# Altium PCB gY-950A20200704V1.PcbDoc (part 2 of 5)
Units mm, origin at the board's own origin, x right, y up, seen from the top; angles counter-clockwise.
Board outline 59.48 x 100.3 mm, 2 copper layers (Top Layer, Bottom Layer), stack 0.193 mm thick; 144 components, 124 nets, 550 pads, 234 vias.
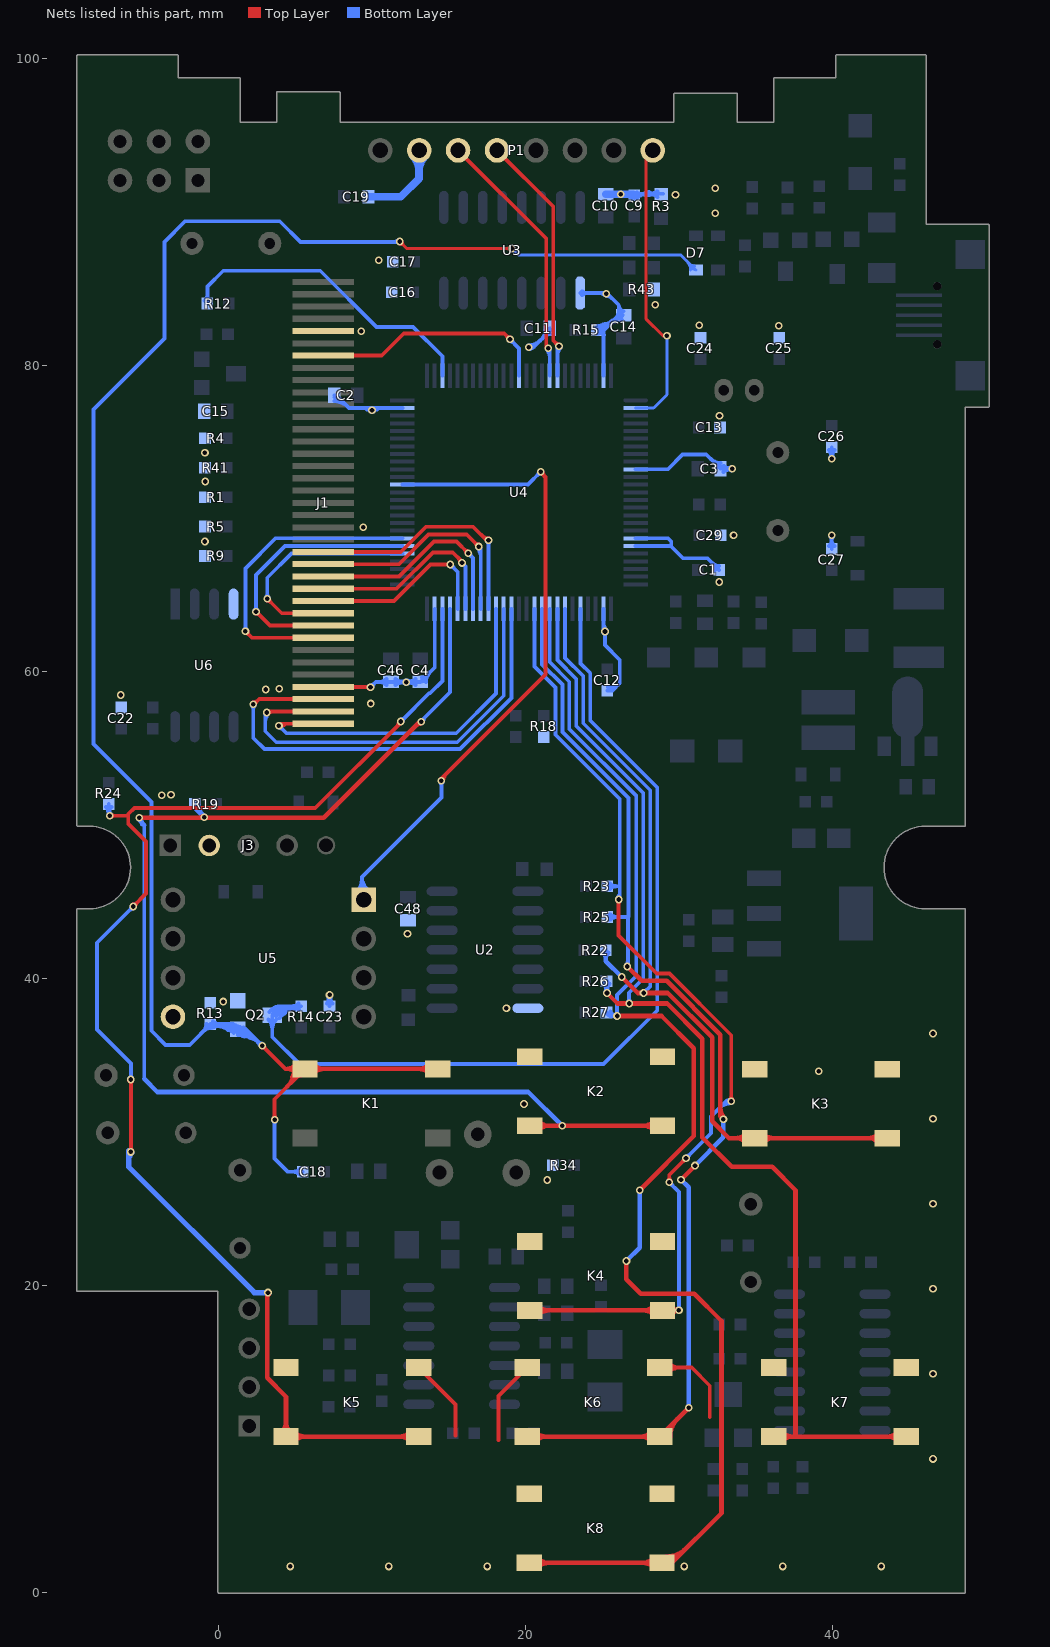
[diagram p2: the nets of this part, all layers, seen from the top]

## Via types
v1: diameter 0.5, hole 0.3, Top Layer to Bottom Layer, tented both sides, 234 vias

## Nets (pads, with @x,y where several pads share a name; then routed paths per layer and width w, separated by ;. In a path a pad name is that pad's centre, name@x,y a point inside that pad or via, vN(x,y) a via of type N, cw(c..) or ccw(c..) an arc to the next point about the centre after c; other vN are vias at no path point) (continued)
DB5: J1.35 U4.39 | length 32.8
  Top Layer w0.25: v1@2.311,57.912 2.625,58.225 J1.35@6.807,58.225 ; v1@2.235,58.012 ccw(c2.235,58.436) 2.535,58.136 cw(c2.235,58.436) v1@2.235,58.012
  Bottom Layer w0.25: v1@2.261,57.912 v1(2.235,57.887) 2.235,55.702 2.972,54.966 15.723,54.966 19.066,58.309 U4.39@19.066,64.112 ; 2.235,57.585 cw(c2.537,57.585) 2.324,57.798 ccw(c2.537,57.585) 2.235,57.585 ; 2.235,57.585 ccw(c1.933,57.585) 2.147,57.798 cw(c1.933,57.585) 2.235,57.585
DB6: J1.36 U4.40 | length 30
  Top Layer w0.25: v1(3.124,57.353) 3.196,57.425 J1.36@6.807,57.425 ; v1@3.213,57.265 cw(c3.6,56.878) 3.6,57.425 ccw(c3.6,56.878) v1@3.213,57.265
  Bottom Layer w0.25: v1@3.042,57.259 cw(c2.925,57.124) 3.08,57.034 ; v1@3.175,57.455 3.023,57.302 3.023,56.134 3.738,55.419 15.535,55.419 18.566,58.45 U4.40@18.566,64.112 ; 3.023,56.806 cw(c3.671,56.806) 3.213,57.265 ccw(c3.671,56.806) 3.023,56.806
DB7: J1.37 U4.41 | length 26.4
  Top Layer w0.25: v1(3.912,56.49) 4.047,56.625 J1.37@6.807,56.625 ; v1@3.99,56.587 ccw(c4.153,56.789) 4.282,56.564 ; v1@4,56.401 cw(c4.541,55.86) 4.541,56.625 ccw(c4.541,55.86) v1@4,56.401
  Bottom Layer w0.25: v1(3.912,56.49) 4.401,56 15.475,56 18.066,58.591 U4.41@18.066,64.112 ; 4.125,56.276 cw(c4.338,56.49) 4.037,56.49 ccw(c4.338,56.49) 4.125,56.276 ; 4.125,56.276 ccw(c3.912,56.063) 3.912,56.365 cw(c3.912,56.063) 4.125,56.276
DB8: J1.23 U4.42 | length 18.3
  Top Layer w0.25: J1.23@6.807,67.825 11.85,67.825 13.493,69.469 16.561,69.469 17.501,68.529 17.526,68.529 v1(17.577,68.58) ; 17.147,68.883 ccw(c17.577,69.313) 17.577,68.705 cw(c17.577,69.313) 17.147,68.883
  Bottom Layer w0.25: U4.42@17.566,64.112 17.566,68.464 17.501,68.529 17.526,68.529 v1(17.577,68.58) ; v1@17.488,68.492 cw(c17.301,68.304) 17.566,68.304 ccw(c17.301,68.304) v1@17.488,68.492 ; 17.566,68.253 cw(c17.904,68.253) 17.665,68.492 ccw(c17.904,68.253) 17.566,68.253
DB9: J1.24 U4.43 | length 17.8
  Top Layer w0.25: J1.24@6.807,67.025 11.729,67.025 13.665,68.961 16.154,68.961 v1(16.942,68.174) ; 16.728,68.387 cw(c16.515,68.174) 16.817,68.174 ccw(c16.515,68.174) 16.728,68.387 ; 16.728,68.387 ccw(c16.942,68.6) 16.942,68.299 cw(c16.942,68.6) 16.728,68.387
  Bottom Layer w0.25: v1(16.942,68.174) 17.066,68.049 U4.43@17.066,64.112 ; 17.007,67.82 cw(c17.207,67.936) v1@17.035,68.09 ; v1@16.853,68.085 cw(c16.34,67.572) 17.066,67.572 ccw(c16.34,67.572) v1@16.853,68.085
DB10: J1.25 U4.44 | length 16.4
  Top Layer w0.25: J1.25@6.807,66.225 11.742,66.225 14.021,68.504 15.494,68.504 v1(16.256,67.742) ; 16.043,67.955 cw(c15.829,67.742) 16.131,67.742 ccw(c15.829,67.742) 16.043,67.955 ; 16.043,67.955 ccw(c16.256,68.169) 16.256,67.867 cw(c16.256,68.169) 16.043,67.955
  Bottom Layer w0.25: v1(16.256,67.742) 16.566,67.432 U4.44@16.566,64.112 ; 16.469,67.528 cw(c16.683,67.742) 16.381,67.742 ccw(c16.683,67.742) 16.469,67.528 ; 16.469,67.528 ccw(c16.256,67.315) 16.256,67.617 cw(c16.256,67.315) 16.469,67.528
DB11: J1.26 U4.45 | length 14.2
  Top Layer w0.25: J1.26@6.807,65.425 11.583,65.425 13.951,67.793 15.24,67.793 15.875,67.158 15.875,67.132 v1(15.85,67.107) ; 15.582,67.45 cw(c15.239,67.107) 15.725,67.107 ccw(c15.239,67.107) 15.582,67.45
  Bottom Layer w0.25: v1(15.85,67.107) 16.066,66.89 U4.45@16.066,64.112
DB12: J1.27 U4.46 | length 14.3
  Top Layer w0.25: J1.27@6.807,64.625 11.424,64.625 13.804,67.005 v1(15.088,67.005) ; 14.786,67.005 cw(c14.786,66.703) 14.999,66.917 ccw(c14.786,66.703) 14.786,67.005 ; 14.786,67.005 ccw(c14.786,67.307) 14.999,67.094 cw(c14.786,67.307) 14.786,67.005
  Bottom Layer w0.25: v1(15.088,67.005) 15.566,66.527 U4.46@15.566,64.112 ; 15.301,66.792 cw(c15.514,67.005) 15.213,67.005 ccw(c15.514,67.005) 15.301,66.792 ; 15.301,66.792 ccw(c15.088,66.578) 15.088,66.88 cw(c15.088,66.578) 15.301,66.792
DB13: J1.28 U4.55 | length 16.9
  Top Layer w0.25: v1(3.15,64.77) 4.094,63.825 J1.28@6.807,63.825 ; 3.363,64.557 cw(c3.576,64.77) 3.275,64.77 ccw(c3.576,64.77) 3.363,64.557 ; 3.363,64.557 ccw(c3.15,64.343) 3.15,64.645 cw(c3.15,64.343) 3.363,64.557
  Bottom Layer w0.25: v1@3.099,64.719 v1(3.15,64.77) 3.15,66.142 4.72,67.712 U4.55@11.966,67.712 ; 3.15,65.072 cw(c2.848,65.072) 3.061,64.858 ccw(c2.848,65.072) 3.15,65.072 ; 3.15,65.072 ccw(c3.451,65.072) 3.238,64.858 cw(c3.451,65.072) 3.15,65.072
DB14: J1.29 U4.56 | length 19.4
  Top Layer w0.25: v1(2.413,63.932) 3.32,63.025 J1.29@6.807,63.025 ; 2.626,63.718 cw(c2.84,63.932) 2.538,63.932 ccw(c2.84,63.932) 2.626,63.718 ; 2.626,63.718 ccw(c2.413,63.505) 2.413,63.807 cw(c2.413,63.505) 2.626,63.718
  Bottom Layer w0.25: v1(2.413,63.932) 2.413,66.319 4.306,68.212 U4.56@11.966,68.212 ; 2.413,64.234 cw(c2.111,64.234) 2.325,64.02 ccw(c2.111,64.234) 2.413,64.234 ; 2.413,64.234 ccw(c2.715,64.234) 2.501,64.02 cw(c2.715,64.234) 2.413,64.234
DB15: J1.30 U4.57 | length 22.3
  Top Layer w0.25: v1(1.727,62.662) 2.164,62.225 J1.30@6.807,62.225 ; 1.941,62.448 cw(c2.154,62.662) 1.852,62.662 ccw(c2.154,62.662) 1.941,62.448 ; 1.941,62.448 ccw(c1.727,62.235) 1.727,62.537 cw(c1.727,62.235) 1.941,62.448
  Bottom Layer w0.25: v1(1.727,62.662) 1.727,66.751 3.688,68.712 U4.57@11.966,68.712 ; 1.727,62.964 cw(c1.425,62.964) 1.639,62.75 ccw(c1.425,62.964) 1.727,62.964 ; 1.727,62.964 ccw(c2.029,62.964) 1.816,62.75 cw(c2.029,62.964) 1.727,62.964
GND: C1.2 C2.2 C3.2 C4.2 C9.2 C10.2 C11.1 C12.2 C13.2 C14.2 C15.2 C16.2 C17.1 C19.2 C22.1 C23.1 C24.1 C25.1 C26.1 C27.1 C29.1 C46.2 C48.1 J1.5 J1.34 J3.2 K2.3 K2.4 K3.3 K3.4 K4.3 K4.4 K5.3 K5.4 K6.3 K6.4 K7.3 K7.4 K8.3 K8.4 P1.2 Q2.E R1.1 R3.1 R4.1 R5.1 R9.1 R13.1 R15.2 R18.1 R34.1 R41.1 R43.2 U2.7 U3.1 U4.10 U4.19 U4.20 U4.27 U4.49 U4.74 U4.99 U5.5 U6.4 | length 167.3
  Top Layer w0.25: J1.34@6.807,59.025 9.86,59.025 v1(9.881,59.004) ; K5.3@13.019,14.643 15.418,12.244 15.418,10.211 ; 18.237,9.931 18.237,12.788 K6.4@20.092,14.643 K6.4@19.774,14.643 ; K6.3@28.742,14.643 30.823,14.643 32.004,13.462 32.004,11.405 ; K6.3@29.318,14.342 cw(c30.043,13.617) 30.043,14.643 cw(c30.043,15.669) K6.3@29.318,14.943 ; 9.528,59.025 cw(c9.528,58.652) 9.792,58.916 ccw(c9.528,58.652) 9.528,59.025 ; 9.63,59.025 ccw(c9.63,59.255) 9.792,59.093 cw(c9.63,59.255) 9.63,59.025
  Bottom Layer w0.25: C23.1@7.079,38.419 ccw(c6.859,38.778) v1@7.28,38.778 ; 7.145,38.656 cw(c6.757,38.656) C23.1@7.032,38.382 ; v1@7.145,38.778 ccw(c7.567,38.778) C23.1@7.346,38.419 ; C23.1@7.213,38.201 v1(7.213,38.939) ; 7.28,38.656 ccw(c7.668,38.656) C23.1@7.394,38.382 ; C2.2@7.531,78.037 7.651,78.037 8.487,77.201 11.955,77.201 U4.74@11.966,77.212 ; C2.2@7.56,77.949 ccw(c8.289,78.281) 8.081,77.507 ; 9.608,77.14 ccw(c9.741,77.369) v1@9.905,77.162 ; v1(9.881,59.004) 10.224,59.347 C46.2@11.218,59.347 C4.2@13.123,59.347 14.066,60.29 U4.49@14.066,64.112 ; v1@10.06,77.162 ccw(c10.224,77.369) 10.356,77.14 ; C4.2@13.215,59.377 ccw(c13.016,59.983) 13.632,59.818 ; v1@20.193,81.053 ccw(c20.193,81.549) 20.543,81.199 ; v1(20.193,81.178) 20.523,81.178 21.577,82.233 C11.1@21.577,82.406 ; v1@20.193,81.303 ccw(c20.193,82.402) 20.97,81.625 ; v1@20.281,81.09 cw(c20.495,80.877) 20.495,81.178 cw(c20.495,81.48) v1@20.281,81.267 ; 21.175,81.853 cw(c21.756,81.698) C11.1@21.586,82.275 ; U3.1@23.554,84.696 25.286,84.696 26.069,83.913 ; R15.2@24.643,82.293 cw(c25.387,81.864) 25.165,82.693 ; R15.2@24.751,82.066 cw(c24.871,81.825) 25.104,81.959 ; R15.2@24.766,82.518 ccw(c25.065,83.036) 25.22,82.458 ; R15.2@24.811,82.469 cw(c24.193,81.851) 25.066,81.851 ; R15.2@24.862,82.172 cw(c25.389,81.879) 25.233,82.461 ; U4.27@25.066,64.112 25.066,62.64 25.07,62.636 v1(25.171,62.636) 25.171,61.747 26.137,60.782 26.137,59.258 ; U4.99@25.066,79.312 25.066,82.245 26.069,83.248 26.069,83.913 ; v1@25.087,62.729 ccw(c24.962,62.867) 25.124,62.961 ; C12.2@25.323,58.775 25.653,58.775 26.137,59.258 ; C12.2@25.327,58.771 cw(c25.974,58.205) 25.916,59.062 ; 25.743,82.818 ccw(c25.533,83.602) C14.2@26.269,83.262 ; C9.2@27.165,91.173 R3.1@28.962,91.173 ; U4.20@27.166,68.212 29.489,68.212 ; U4.19@27.166,68.712 29.281,68.712 29.489,68.504 29.489,68.212 ; U4.10@27.166,73.212 29.27,73.212 30.234,74.176 31.771,74.176 C3.2@32.702,73.245 v1(33.46,73.245) ; 27.633,91.173 ccw(c27.633,91.519) 27.877,91.274 ; 27.667,91.109 cw(c27.747,90.809) 27.903,91.078 ; 27.679,91.112 ccw(c27.604,91.395) 27.857,91.249 ; 27.695,91.173 cw(c27.695,90.915) 27.877,91.098 ; 28.028,91.078 cw(c28.2,90.78) 28.288,91.112 ; 28.043,91.284 ccw(c28.264,91.565) 28.357,91.22 ; 28.054,91.098 cw(c28.236,90.915) 28.236,91.173 ; 28.054,91.274 ccw(c28.298,91.519) 28.298,91.173 ; 28.074,91.248 ccw(c28.299,91.379) 28.232,91.127 ; 32.232,73.754 cw(c32.066,73.138) C3.2@32.673,73.337 ; C1.2@32.615,66.649 31.852,67.412 30.253,67.412 29.489,68.175 29.489,68.212 ; C26.1@39.811,74.438 cw(c39.555,74.052) v1@40.019,74.052 ; v1@39.888,74.052 cw(c40.352,74.052) C26.1@40.095,74.438 ; 39.888,74.191 ccw(c39.493,74.191) C26.1@39.772,74.471 ; C27.1@39.953,68.02 v1(39.953,68.909) ; v1(39.953,73.89) C26.1@39.953,74.652 ; 40.019,74.191 cw(c40.413,74.191) C26.1@40.134,74.471 ; C23.1@7.032,38.382 ccw(c6.595,38.819) v1@7.213,38.819 ; C23.1@7.032,38.382 ccw(c6.595,38.819) v1@7.213,38.819 ; v1@7.104,38.877 cw(c6.751,38.673) C23.1@7.145,38.567 ; v1@7.104,38.877 cw(c6.751,38.673) C23.1@7.145,38.567 ; v1@7.104,38.877 cw(c6.751,38.673) C23.1@7.145,38.567 ; 7.213,38.637 cw(c7.514,38.637) 7.301,38.851 ccw(c7.514,38.637) 7.213,38.637 ; 7.213,38.637 ccw(c6.911,38.637) 7.124,38.851 cw(c6.911,38.637) 7.213,38.637 ; v1@7.213,38.819 ccw(c7.831,38.819) C23.1@7.394,38.382 ; v1@7.213,38.819 ccw(c7.831,38.819) C23.1@7.394,38.382 ; C23.1@7.28,38.567 cw(c7.674,38.673) v1@7.321,38.877 ; C23.1@7.28,38.567 cw(c7.674,38.673) v1@7.321,38.877 ; C23.1@7.28,38.567 cw(c7.674,38.673) v1@7.321,38.877 ; 10.094,59.218 cw(c9.881,59.431) 9.881,59.129 ccw(c9.881,59.431) 10.094,59.218 ; 10.094,59.218 ccw(c10.307,59.004) 10.006,59.004 cw(c10.307,59.004) 10.094,59.218 ; 10.437,59.347 cw(c10.437,58.668) 10.918,59.148 ccw(c10.437,58.668) 10.437,59.347 ; 10.437,59.347 ccw(c10.437,60.027) 10.918,59.546 cw(c10.437,60.027) 10.437,59.347 ; 11.775,59.287 cw(c11.897,58.832) v1@12.15,59.229 ; 11.775,59.287 cw(c11.897,58.832) v1@12.15,59.229 ; 11.775,59.287 cw(c11.897,58.832) v1@12.15,59.229 ; 11.812,59.397 ccw(c11.929,59.835) v1@12.155,59.443 ; 11.812,59.397 ccw(c11.929,59.835) v1@12.155,59.443 ; 11.812,59.397 ccw(c11.929,59.835) v1@12.155,59.443 ; v1@11.999,59.347 cw(c11.999,60.027) 11.519,59.546 ccw(c11.999,60.027) v1@11.999,59.347 ; v1@11.999,59.347 ccw(c11.999,58.668) 11.519,59.148 cw(c11.999,58.668) v1@11.999,59.347 ; v1@12.28,59.443 ccw(c12.465,59.763) 12.561,59.406 ; v1@12.28,59.443 ccw(c12.465,59.763) 12.561,59.406 ; v1@12.28,59.443 ccw(c12.465,59.763) 12.561,59.406 ; v1@12.283,59.228 cw(c12.501,58.879) 12.607,59.276 ; v1@12.283,59.228 cw(c12.501,58.879) 12.607,59.276 ; v1@12.283,59.228 cw(c12.501,58.879) 12.607,59.276 ; v1@12.326,59.272 cw(c12.528,59.155) 12.468,59.381 ; v1@12.326,59.272 cw(c12.528,59.155) 12.468,59.381 ; v1@12.326,59.272 cw(c12.528,59.155) 12.468,59.381 ; v1@12.342,59.347 cw(c12.342,58.668) 12.823,59.148 ccw(c12.342,58.668) v1@12.342,59.347 ; v1@12.342,59.347 ccw(c12.342,60.027) 12.823,59.546 cw(c12.342,60.027) v1@12.342,59.347 ; 23.989,84.696 cw(c23.989,85.13) 23.682,84.823 ccw(c23.989,85.13) 23.989,84.696 ; 23.989,84.696 ccw(c23.989,84.262) 23.682,84.569 cw(c23.989,84.262) 23.989,84.696 ; 25.171,62.335 cw(c25.473,62.335) 25.26,62.548 ccw(c25.473,62.335) 25.171,62.335 ; 25.171,62.335 ccw(c24.87,62.335) 25.083,62.548 cw(c24.87,62.335) 25.171,62.335 ; 26.069,83.913 ccw(c26.476,83.913) 26.37,83.52 cw(c26.476,83.913) 26.069,83.913 ; 26.137,59.258 cw(c25.537,59.858) 25.372,59.026 ccw(c25.537,59.858) 26.137,59.258 ; 32.178,67.086 cw(c31.741,66.649) 32.359,66.649 ccw(c31.741,66.649) 32.178,67.086 ; 32.178,67.086 ccw(c32.615,67.523) 32.615,66.905 cw(c32.615,67.523) 32.178,67.086 ; 33.116,73.174 cw(c33.212,72.815) v1@33.398,73.137 ; 33.116,73.174 cw(c33.212,72.815) v1@33.398,73.137 ; 33.116,73.174 cw(c33.212,72.815) v1@33.398,73.137 ; 33.116,73.316 ccw(c33.212,73.675) v1@33.398,73.353 ; 33.116,73.316 ccw(c33.212,73.675) v1@33.398,73.353 ; 33.116,73.316 ccw(c33.212,73.675) v1@33.398,73.353 ; 33.159,73.245 cw(c33.159,72.943) 33.372,73.157 ccw(c33.159,72.943) 33.159,73.245 ; 33.159,73.245 ccw(c33.159,73.547) 33.372,73.333 cw(c33.159,73.547) 33.159,73.245 ; 33.211,73.199 ccw(c33.151,73.424) v1@33.352,73.307 ; 33.211,73.199 ccw(c33.151,73.424) v1@33.352,73.307 ; 33.211,73.199 ccw(c33.151,73.424) v1@33.352,73.307 ; 33.211,73.291 cw(c33.151,73.066) v1@33.352,73.182 ; 33.211,73.291 cw(c33.151,73.066) v1@33.352,73.182 ; 33.211,73.291 cw(c33.151,73.066) v1@33.352,73.182 ; v1@33.382,73.245 cw(c33.382,73.924) 32.901,73.444 ccw(c33.382,73.924) v1@33.382,73.245 ; v1@33.382,73.245 ccw(c33.382,72.566) 32.901,73.046 cw(c33.382,72.566) v1@33.382,73.245 ; C26.1@39.772,74.471 cw(c39.335,74.034) v1@39.953,74.034 ; C26.1@39.772,74.471 cw(c39.335,74.034) v1@39.953,74.034 ; v1@39.845,73.952 ccw(c39.473,74.167) C26.1@39.888,74.278 ; v1@39.845,73.952 ccw(c39.473,74.167) C26.1@39.888,74.278 ; v1@39.845,73.952 ccw(c39.473,74.167) C26.1@39.888,74.278 ; 39.953,68.607 cw(c40.255,68.607) 40.042,68.821 ccw(c40.255,68.607) 39.953,68.607 ; 39.953,68.607 ccw(c39.651,68.607) 39.865,68.821 cw(c39.651,68.607) 39.953,68.607 ; 39.953,68.638 cw(c39.335,68.638) 39.772,68.201 ccw(c39.335,68.638) 39.953,68.638 ; 39.953,68.638 ccw(c40.571,68.638) 40.134,68.201 cw(c40.571,68.638) 39.953,68.638 ; v1@39.953,74.034 cw(c40.571,74.034) C26.1@40.134,74.471 ; v1@39.953,74.034 cw(c40.571,74.034) C26.1@40.134,74.471 ; 39.953,74.191 cw(c39.651,74.191) 39.865,73.978 ccw(c39.651,74.191) 39.953,74.191 ; 39.953,74.191 ccw(c40.255,74.191) 40.042,73.978 cw(c40.255,74.191) 39.953,74.191 ; C26.1@40.019,74.278 ccw(c40.433,74.167) v1@40.061,73.952 ; C26.1@40.019,74.278 ccw(c40.433,74.167) v1@40.061,73.952 ; C26.1@40.019,74.278 ccw(c40.433,74.167) v1@40.061,73.952 ; C2.2@7.531,77.654 cw(c7.531,76.44) 8.39,77.299 ccw(c7.531,76.44) C2.2@7.531,77.654 ; C2.2@7.531,77.904 cw(c7.531,77.294) 7.963,77.726 ccw(c7.531,77.294) C2.2@7.531,77.904 ; 9.348,77.201 cw(c9.348,76.429) 9.894,76.975 ccw(c9.348,76.429) 9.348,77.201 ; v1@10.071,76.975 cw(c10.616,76.429) 10.616,77.201 ccw(c10.616,76.429) v1@10.071,76.975 ; 11.885,59.347 cw(c11.885,59.002) 12.129,59.246 ccw(c11.885,59.002) 11.885,59.347 ; 11.947,59.347 ccw(c11.947,59.605) 12.129,59.423 cw(c11.947,59.605) 11.947,59.347 ; v1@12.306,59.246 cw(c12.55,59.002) 12.55,59.347 ccw(c12.55,59.002) v1@12.306,59.246 ; v1@12.306,59.423 ccw(c12.488,59.605) 12.488,59.347 cw(c12.488,59.605) v1@12.306,59.423 ; C4.2@13.225,59.629 ccw(c13.225,60.063) 13.532,59.756 cw(c13.225,60.063) C4.2@13.225,59.629 ; C4.2@13.506,59.347 cw(c14.431,59.347) 13.777,60.001 ccw(c14.431,59.347) C4.2@13.506,59.347 ; 21.046,81.701 ccw(c20.443,82.305) 21.296,82.305 cw(c20.443,82.305) 21.046,81.701 ; 21.22,81.875 cw(c21.577,81.518) 21.577,82.023 ccw(c21.577,81.518) 21.22,81.875 ; R15.2@24.638,82.052 ccw(c24.638,82.619) 25.039,82.218 cw(c24.638,82.619) R15.2@24.638,82.052 ; R15.2@24.638,82.302 ccw(c24.638,83.472) 25.465,82.645 cw(c24.638,83.472) R15.2@24.638,82.302 ; R15.2@24.638,82.552 ccw(c24.638,84.326) 25.892,83.071 cw(c24.638,84.326) R15.2@24.638,82.552 ; 24.834,84.696 cw(c24.834,84.245) 25.154,84.564 ccw(c24.834,84.245) 24.834,84.696 ; 25.066,63.192 ccw(c25.727,63.192) 25.26,62.725 cw(c25.727,63.192) 25.066,63.192 ; v1@25.242,84.527 cw(c25.242,84.014) 25.605,84.377 ccw(c25.242,84.014) v1@25.242,84.527 ; C12.2@25.324,58.78 ccw(c25.427,59.305) 25.805,58.927 cw(c25.427,59.305) C12.2@25.324,58.78 ; 25.427,82.606 cw(c26.298,81.736) 26.298,82.967 ccw(c26.298,81.736) 25.427,82.606 ; 25.545,82.848 cw(c26.043,82.073) 26.238,82.973 ccw(c26.043,82.073) 25.545,82.848 ; 25.832,83.033 ccw(c25.595,83.401) 26.023,83.308 cw(c25.595,83.401) 25.832,83.033 ; 25.854,83.033 cw(c26.298,82.589) 26.298,83.217 ccw(c26.298,82.589) 25.854,83.033 ; C14.2@26.069,83.587 ccw(c26.388,83.587) 26.306,83.279 cw(c26.388,83.587) C14.2@26.069,83.587 ; C9.2@27.258,90.904 cw(c27.907,90.255) 27.907,91.173 ccw(c27.907,90.255) C9.2@27.258,90.904 ; C9.2@27.258,91.266 ccw(c27.483,91.491) 27.483,91.173 cw(c27.483,91.491) C9.2@27.258,91.266 ; 28.06,91.173 cw(c28.06,90.423) 28.591,90.953 ccw(c28.06,90.423) 28.06,91.173 ; 28.183,91.173 ccw(c28.183,91.75) 28.591,91.342 cw(c28.183,91.75) 28.183,91.173 ; 32.049,73.899 ccw(c32.702,74.553) 32.702,73.628 cw(c32.702,74.553) 32.049,73.899 ; 32.294,73.653 cw(c31.987,73.347) 32.421,73.347 ccw(c31.987,73.347) 32.294,73.653
  Bottom Layer w0.508: C19.2@9.747,90.978 11.857,90.978 13.052,92.173 P1.2@13.052,94.004 ; P1.2@12.666,93.618 cw(c11.733,92.686) 13.052,92.686 cw(c14.37,92.686) P1.2@13.438,93.618 ; C10.2@25.231,91.148 C9.2@27.015,91.148 ; 26.62,91.148 cw(c26.62,90.628) 26.988,90.996 ccw(c26.62,90.628) 26.62,91.148
  other v1: 4.648,1.676 11.07,1.676 17.492,1.676 30.336,1.676 36.758,1.676 43.18,1.676 46.558,8.687 46.558,14.234 46.558,19.782 46.558,25.329 21.412,26.873 46.558,30.876 19.888,31.826 39.116,33.96 46.558,36.424 18.745,38.075 0.279,38.506 12.294,42.926 -3.734,51.968 -3.124,51.994 9.906,57.937 -6.401,58.496 3.048,58.852 3.937,58.903 12.217,59.334 32.614,65.862 -0.914,68.504 33.553,68.91 9.398,69.444 -0.889,72.415 -0.914,74.295 32.639,76.708 9.982,77.064 9.271,82.22 36.5,82.575 31.318,82.601 28.448,83.947 25.242,84.652 10.414,86.843 32.36,89.916 29.769,91.11 26.187,91.135 32.36,91.542
HARDWARE_POWER: C18.2 D7.1 K1.1 K1.2 Q2.B R13.2 | length 176.7
  Top Layer w0.203: v1@11.788,87.913 cw(c11.792,87.571) 12.036,87.812 ; v1@11.811,88.036 12.243,87.605 v1(19.101,87.605) ; v1@11.934,88.06 ccw(c12.276,88.055) 12.036,87.812 ; v1@11.786,87.913 cw(c11.788,87.56) 12.039,87.808 ; v1@11.787,87.913 cw(c11.789,87.563) 12.035,87.812 ; v1@11.787,87.913 cw(c11.789,87.563) 12.035,87.812 ; v1@11.934,88.061 ccw(c12.285,88.059) 12.035,87.812 ; v1@11.934,88.061 ccw(c12.285,88.059) 12.035,87.812 ; v1@11.934,88.061 ccw(c12.287,88.06) 12.039,87.808 ; 12.039,87.808 cw(c12.292,88.062) 11.934,88.062 ccw(c12.292,88.062) 12.039,87.808 ; 12.039,87.808 ccw(c11.786,87.555) 11.786,87.913 cw(c11.786,87.555) 12.039,87.808 ; 18.743,87.605 cw(c18.743,87.246) 18.996,87.5 ccw(c18.743,87.246) 18.743,87.605 ; 18.743,87.605 ccw(c18.743,87.963) 18.996,87.71 cw(c18.743,87.963) 18.743,87.605
  Top Layer w0.254: v1(2.82,35.636) 4.333,34.122 ; v1(3.632,30.81) 3.632,32.14 K1.2@5.614,34.122 4.333,34.122 ; 4.774,33.593 cw(c5.658,33.356) K1.2@5.306,34.201 ; 3.03,35.426 cw(c3.24,35.636) 2.943,35.636 ccw(c3.24,35.636) 3.03,35.426 ; 3.03,35.426 ccw(c2.82,35.216) 2.82,35.513 cw(c2.82,35.216) 3.03,35.426 ; 3.632,31.107 cw(c3.335,31.107) 3.545,30.897 ccw(c3.335,31.107) 3.632,31.107 ; 3.632,31.107 ccw(c3.929,31.107) 3.719,30.897 cw(c3.929,31.107) 3.632,31.107 ; 4.333,34.122 cw(c4.333,33.138) 5.037,33.826 ccw(c4.333,33.138) 4.333,34.122 ; 4.333,34.122 ccw(c4.333,35.106) 5.037,34.418 cw(c4.333,35.106) 4.333,34.122 ; 4.422,32.931 ccw(c3.231,34.122) 4.916,34.122 cw(c3.231,34.122) 4.422,32.931 ; 4.856,33.364 ccw(c4.098,34.122) 5.17,34.122 cw(c4.098,34.122) 4.856,33.364 ; K1.2@5.086,33.595 cw(c5.339,33.342) 5.339,33.699 ccw(c5.339,33.342) K1.2@5.086,33.595
  Top Layer w0.3: K1.2@5.614,34.122 K1.1@14.264,34.122 ; 6.855,34.122 cw(c6.855,35.088) 6.172,34.405 ccw(c6.855,35.088) 6.855,34.122 ; 6.855,34.122 ccw(c6.855,33.157) 6.172,33.839 cw(c6.855,33.157) 6.855,34.122 ; 13.023,34.122 cw(c13.023,33.157) 13.706,33.839 ccw(c13.023,33.157) 13.023,34.122 ; 13.023,34.122 ccw(c13.023,35.088) 13.706,34.405 cw(c13.023,35.088) 13.023,34.122
  Bottom Layer w0.203: v1@19.101,87.655 19.583,87.173 30.129,87.173 D7.1@31.096,86.205 ; 30.626,86.66 ccw(c31.204,86.814) D7.1@31.01,86.248 ; v1@19.101,87.456 cw(c19.101,86.975) 19.441,87.315 ccw(c19.101,86.975) v1@19.101,87.456 ; v1@19.249,87.605 ccw(c19.485,87.605) 19.318,87.438 cw(c19.485,87.605) v1@19.249,87.605 ; 30.501,86.8 cw(c29.906,86.205) 30.748,86.205 ccw(c29.906,86.205) 30.501,86.8 ; 30.743,86.559 ccw(c30.996,86.812) 30.996,86.454 cw(c30.996,86.812) 30.743,86.559
  Bottom Layer w0.254: 0.249,36.861 ccw(c0.535,37.357) Q2.B@0.954,36.967 ; 0.526,36.702 ccw(c0.775,37.134) Q2.B@1.14,36.794 ; 0.581,36.953 ccw(c0.753,37.251) Q2.B@0.981,36.993 ; 0.63,36.925 cw(c0.376,36.485) Q2.B@0.867,36.616 ; Q2.B@1.11,36.645 ccw(c1.893,37.097) Q2.B@1.659,36.224 ; Q2.B@1.33,36.772 ccw(c2.644,37.531) 2.252,36.065 ; Q2.B@1.336,36.761 ccw(c1.804,36.969) Q2.B@1.671,36.475 ; Q2.B@1.414,36.39 cw(c1.668,35.95) 1.799,36.44 ; v1(2.82,35.636) 1.743,36.713 ; v1(3.632,30.81) 3.632,28.27 4.495,27.408 C18.2@5.46,27.408 ; v1@11.811,88.036 5.309,88.036 3.962,89.383 -2.21,89.383 -3.556,88.036 -3.556,81.737 -8.173,77.12 -8.173,55.29 -4.394,51.511 -4.394,36.601 -3.48,35.687 -1.905,35.687 R13.2@-0.559,37.033 0.907,37.033 Q2.B@1.227,36.713 1.743,36.713 ; -0.992,36.6 cw(c-0.559,36.166) -0.559,36.779 ccw(c-0.559,36.166) -0.992,36.6 ; -0.992,36.6 ccw(c-1.426,37.033) -0.813,37.033 cw(c-1.426,37.033) -0.992,36.6 ; 0.054,37.033 cw(c0.054,37.646) -0.379,37.213 ccw(c0.054,37.646) 0.054,37.033 ; 0.054,37.033 ccw(c0.054,36.42) -0.379,36.854 cw(c0.054,36.42) 0.054,37.033 ; 1.743,36.713 cw(c1.743,36.883) 1.581,36.829 ccw(c1.743,36.883) 1.743,36.713 ; 1.743,36.713 ccw(c1.743,36.542) 1.581,36.596 cw(c1.743,36.542) 1.743,36.713 ; 2.529,35.844 cw(c2.329,35.518) v1@2.7,35.607 ; 2.529,35.844 cw(c2.329,35.518) v1@2.7,35.607 ; 2.529,35.844 cw(c2.329,35.518) v1@2.7,35.607 ; 2.61,35.846 cw(c2.4,35.636) 2.697,35.636 ccw(c2.4,35.636) 2.61,35.846 ; 2.61,35.846 ccw(c2.82,36.055) 2.82,35.759 cw(c2.82,36.055) 2.61,35.846 ; 3.632,30.513 cw(c3.929,30.513) 3.719,30.723 ccw(c3.929,30.513) 3.632,30.513 ; 3.632,30.513 ccw(c3.335,30.513) 3.545,30.723 cw(c3.335,30.513) 3.632,30.513 ; 4.847,27.408 cw(c4.847,26.794) 5.28,27.228 ccw(c4.847,26.794) 4.847,27.408 ; 4.847,27.408 ccw(c4.847,28.021) 5.28,27.587 cw(c4.847,28.021) 4.847,27.408 ; R13.2@-0.447,37.033 cw(c-0.447,35.038) 0.963,36.449 ccw(c-0.447,35.038) R13.2@-0.447,37.033 ; R13.2@-0.432,36.813 cw(c-0.076,36.197) 0.108,36.884 ccw(c-0.076,36.197) R13.2@-0.432,36.813 ; R13.2@-0.339,37.16 ccw(c0.107,37.418) -0.026,36.92 cw(c0.107,37.418) R13.2@-0.339,37.16 ; 0.166,37.033 cw(c0.166,35.651) 1.143,36.628 ccw(c0.166,35.651) 0.166,37.033 ; Q2.B@0.779,37.033 cw(c0.779,36.265) 1.323,36.808 ccw(c0.779,36.265) Q2.B@0.779,37.033 ; Q2.B@1.227,36.34 cw(c1.227,34.194) 2.744,35.711 ccw(c1.227,34.194) Q2.B@1.227,36.34 ; Q2.B@1.227,36.594 cw(c1.227,35.061) 2.311,36.145 ccw(c1.227,35.061) Q2.B@1.227,36.594 ; Q2.B@1.227,36.848 cw(c1.227,35.928) 1.877,36.578 ccw(c1.227,35.928) Q2.B@1.227,36.848 ; 11.427,88.036 ccw(c11.427,88.42) 11.699,88.149 cw(c11.427,88.42) 11.427,88.036
  other v1: 11.786,88.062
IIC1_SCL: P1.3 U4.92 | length 18.4
  Top Layer w0.25: P1.3@15.592,94.004 21.34,88.256 21.34,81.225 v1(21.463,81.102)
  Bottom Layer w0.25: v1(21.463,81.102) 21.566,80.999 U4.92@21.566,79.312 ; 21.509,80.781 cw(c21.667,80.872) v1@21.546,81.009 ; v1@21.375,81.014 cw(c20.912,80.551) 21.566,80.551 ccw(c20.912,80.551) v1@21.375,81.014
IIC1_SDA: P1.4 U4.93 | length 18.7
  Top Layer w0.25: P1.4@18.132,94.004 21.793,90.343 21.793,81.61 v1(22.174,81.229) ; 21.961,81.443 cw(c21.747,81.229) 22.049,81.229 ccw(c21.747,81.229) 21.961,81.443 ; 21.961,81.443 ccw(c22.174,81.656) 22.174,81.354 cw(c22.174,81.656) 21.961,81.443
  Bottom Layer w0.25: U4.93@22.066,79.312 22.066,81.121 v1(22.174,81.229) ; v1@22.089,81.138 cw(c21.957,80.997) 22.124,80.901 ; 22.066,80.667 cw(c22.737,80.667) 22.263,81.141 ccw(c22.737,80.667) 22.066,80.667
INT: P1.8 U4.2 | length 19.2
  Top Layer w0.203: P1.8@28.292,94.004 27.838,93.551 27.838,83.033 28.956,81.915 v1(29.21,81.915)
  Bottom Layer w0.203: U4.2@27.166,77.212 28.343,77.212 29.21,78.08 v1(29.21,81.915)
IO3: U4.64 U5.1 | length 51.5
  Top Layer w0.254: v1(14.503,52.908) 14.503,53.043 21.281,59.821 21.281,72.699 v1@20.98,73 ; v1@14.626,52.908 cw(c15.249,52.908) 14.809,53.348 ccw(c15.249,52.908) v1@14.626,52.908 ; v1@21.103,73.05 ccw(c21.523,73.05) 21.226,72.754 cw(c21.523,73.05) v1@21.103,73.05
  Bottom Layer w0.25: U4.64@11.966,72.212 20.142,72.212 v1(20.98,73.05) ; 20.767,72.837 cw(c20.98,72.624) 20.98,72.925 ccw(c20.98,72.624) 20.767,72.837 ; 20.767,72.837 ccw(c20.554,73.05) 20.855,73.05 cw(c20.554,73.05) 20.767,72.837
  Bottom Layer w0.254: U5.1@9.322,45.136 9.322,46.634 ; v1(14.503,52.908) 14.503,51.816 9.322,46.634 ; 9.322,46.634 ccw(c10.452,46.634) 9.823,45.695 cw(c10.452,46.634) 9.322,46.634 ; 14.503,52.611 cw(c14.8,52.611) 14.59,52.821 ccw(c14.8,52.611) 14.503,52.611 ; 14.503,52.611 ccw(c14.206,52.611) 14.416,52.821 cw(c14.206,52.611) 14.503,52.611 ; U5.1@8.973,45.612 ccw(c8.131,46.454) 9.322,46.454 cw(c8.131,46.454) U5.1@8.973,45.612 ; 9.322,46.159 ccw(c10.134,46.159) 9.682,45.484 cw(c10.134,46.159) 9.322,46.159
K1: Q2.C R14.2 U4.30 | length 80
  Bottom Layer w0.25: U4.30@23.566,64.112 23.566,60.559 24.206,59.919 24.206,56.845
  Bottom Layer w0.254: Q2.C@3.693,37.716 ccw(c3.973,38.143) 4.32,37.769 ; Q2.C@3.779,37.957 ccw(c3.954,38.35) 4.247,38.035 ; Q2.C@3.832,37.928 ccw(c4.156,38.422) 4.558,37.989 ; Q2.C@4,37.603 cw(c4.508,37.584) 4.162,37.956 ; 24.206,56.845 28.575,52.476 28.575,37.922 25.086,34.433 5.242,34.433 3.477,36.198 Q2.C@3.477,37.617 4.062,38.202 ; 3.477,36.716 cw(c4.378,36.716) 3.741,37.353 ccw(c4.378,36.716) 3.477,36.716 ; 3.477,36.716 ccw(c2.577,36.716) 3.213,37.353 cw(c2.577,36.716) 3.477,36.716 ; 4.062,38.202 ccw(c4.352,37.912) 3.973,37.757 cw(c4.352,37.912) 4.062,38.202 ; 4.062,38.202 R14.2@5.359,38.202 ; 4.746,38.202 cw(c4.746,37.588) 5.18,38.022 ccw(c4.746,37.588) 4.746,38.202 ; 4.746,38.202 ccw(c4.746,38.815) 5.18,38.381 cw(c4.746,38.815) 4.746,38.202 ; 4.767,38.043 cw(c4.926,37.451) 5.232,37.982 ccw(c4.926,37.451) 4.767,38.043 ; 4.767,38.043 ccw(c4.608,38.635) 5.139,38.329 cw(c4.608,38.635) 4.767,38.043 ; R14.2@5.359,38.202 ccw(c5.359,36.53) 3.943,37.418 cw(c5.359,36.53) R14.2@5.359,38.202 ; Q2.C@3.298,37.823 cw(c3.982,37.394) 3.982,38.202 ccw(c3.982,37.394) Q2.C@3.298,37.823 ; Q2.C@3.513,37.688 cw(c4.441,37.106) 4.441,38.202 ccw(c4.441,37.106) Q2.C@3.513,37.688 ; Q2.C@3.627,37.99 ccw(c3.627,38.528) 4.008,38.147 cw(c3.627,38.528) Q2.C@3.627,37.99 ; Q2.C@3.728,37.553 cw(c4.9,36.818) 4.9,38.202 ccw(c4.9,36.818) Q2.C@3.728,37.553
K2: K2.1 K2.2 R19.2 U4.47 | length 95.4
  Top Layer w0.3: v1(-5.207,50.495) 6.833,50.495 13.081,56.744 v1(13.183,56.744) ; -1.278,50.495 ccw(c-1.278,50.835) v1@-1.038,50.595 ; v1@-0.897,50.595 ccw(c-0.656,50.835) -0.656,50.495 ; K2.1@20.27,30.41 v1(22.377,30.41) K2.2@28.92,30.41 ; 21.511,30.41 cw(c21.511,31.375) 20.828,30.692 ccw(c21.511,31.375) 21.511,30.41 ; 21.511,30.41 ccw(c21.511,29.444) 20.828,30.127 cw(c21.511,29.444) 21.511,30.41 ; 27.679,30.41 cw(c27.679,29.444) 28.362,30.127 ccw(c27.679,29.444) 27.679,30.41 ; 27.679,30.41 ccw(c27.679,31.375) 28.362,30.692 cw(c27.679,31.375) 27.679,30.41 ; 12.838,56.501 cw(c13.183,56.157) 13.183,56.644 ccw(c13.183,56.157) 12.838,56.501
  Bottom Layer w0.25: -4.874,33.475 -4.874,50.013 ; 12.979,56.591 15.066,58.678 U4.47@15.066,64.112 ; v1@13.308,56.744 cw(c13.732,56.744) 13.432,57.044 ccw(c13.732,56.744) v1@13.308,56.744
  Bottom Layer w0.3: v1@-5.257,50.409 cw(c-5.543,49.914) -4.991,50.062 ; v1(-5.207,50.495) -5.207,50.345 -4.874,50.013 ; -4.874,33.475 -4.013,32.614 20.173,32.614 v1(22.377,30.41) ; R19.2@-1.575,51.384 -1.575,51.131 v1(-0.967,50.524) ; R19.2@-1.344,51.384 ccw(c-0.176,51.384) v1@-1.002,50.558 ; -1.114,50.753 ccw(c-0.868,50.895) v1@-0.942,50.621 ; v1@-5.107,50.495 ccw(c-4.503,50.495) -4.93,50.068 cw(c-4.503,50.495) v1@-5.107,50.495
K3: K3.1 K3.2 R22.2 U4.32 | length 66.5
  Top Layer w0.3: v1@26.213,40.157 v1(26.264,40.107) 27.305,39.065 v1(27.686,39.065) 29.261,39.065 32.156,36.17 32.156,30.699 33.259,29.597 K3.1@34.926,29.597 K3.2@43.576,29.597 ; 33.685,29.597 cw(c33.685,28.631) 34.368,29.314 ccw(c33.685,28.631) 33.685,29.597 ; 33.685,29.597 ccw(c33.685,30.563) 34.368,29.88 cw(c33.685,30.563) 33.685,29.597 ; 36.166,29.597 cw(c36.166,30.563) 35.483,29.88 ccw(c36.166,30.563) 36.166,29.597 ; 36.166,29.597 ccw(c36.166,28.631) 35.483,29.314 cw(c36.166,28.631) 36.166,29.597 ; 42.335,29.597 cw(c42.335,28.631) 43.018,29.314 ccw(c42.335,28.631) 42.335,29.597 ; 42.335,29.597 ccw(c42.335,30.563) 43.018,29.88 cw(c42.335,30.563) 42.335,29.597
  Bottom Layer w0.25: U4.32@22.566,64.112 22.566,60.918 23.753,59.731 23.753,57.036 23.751,57.034 23.751,56.657 28.12,52.288 28.12,39.499 v1(27.686,39.065) ; 27.899,39.279 cw(c27.686,39.492) 27.686,39.19 ccw(c27.686,39.492) 27.899,39.279 ; 27.899,39.279 ccw(c28.113,39.065) 27.811,39.065 cw(c28.113,39.065) 27.899,39.279
  Bottom Layer w0.3: R22.2@25.222,41.859 25.222,41.148 v1(26.264,40.107) ; 25.222,41.302 cw(c25.78,41.302) 25.386,41.696 ccw(c25.78,41.302) 25.222,41.302 ; 25.222,41.302 ccw(c24.665,41.302) 25.059,41.696 cw(c24.665,41.302) 25.222,41.302
K4: K4.1 K4.2 R23.2 U4.36 | length 83.3
  Top Layer w0.25: v1(26.06,45.161) 26.06,42.824 28.55,40.335 29.379,40.335 33.401,36.313 v1(33.401,32.004) ; v1(29.362,26.721) 29.362,27.203 v1(30.455,28.296) ; v1@33.313,32.092 ccw(c33.099,32.306) 33.401,32.306 ccw(c33.703,32.306) v1@33.489,32.092 ; 26.06,44.859 cw(c26.362,44.859) 26.149,45.073 ccw(c26.362,44.859) 26.06,44.859 ; 26.06,44.859 ccw(c25.759,44.859) 25.972,45.073 cw(c25.759,44.859) 26.06,44.859 ; 29.362,27.023 cw(c29.061,27.023) 29.274,26.809 ccw(c29.061,27.023) 29.362,27.023 ; 29.362,27.023 ccw(c29.664,27.023) 29.451,26.809 cw(c29.664,27.023) 29.362,27.023 ; 30.241,28.082 cw(c30.455,27.869) 30.455,28.171 ccw(c30.455,27.869) 30.241,28.082 ; 30.241,28.082 ccw(c30.028,28.296) 30.33,28.296 cw(c30.028,28.296) 30.241,28.082
  Top Layer w0.3: K4.1@20.27,18.37 K4.2@28.92,18.37 v1(29.992,18.37) ; 21.511,18.37 cw(c21.511,19.336) 20.828,18.653 ccw(c21.511,19.336) 21.511,18.37 ; 21.511,18.37 ccw(c21.511,17.404) 20.828,18.087 cw(c21.511,17.404) 21.511,18.37 ; 27.679,18.37 cw(c27.679,17.404) 28.362,18.087 ccw(c27.679,17.404) 27.679,18.37 ; 27.679,18.37 ccw(c27.679,19.336) 28.362,18.653 cw(c27.679,19.336) 27.679,18.37 ; v1(29.992,18.37) cw(c29.992,18.963) 29.516,18.609 ccw(c29.992,18.963) v1(29.992,18.37) ; v1(29.992,18.37) ccw(c29.992,17.777) 29.516,18.131 cw(c29.992,17.777) v1(29.992,18.37)
  Bottom Layer w0.25: U4.36@20.566,64.112 20.566,60.354 21.938,58.982 21.938,55.906 26.137,51.707 v1@26.137,45.263 ; R23.2@25.324,46.025 26.086,46.025 ; 26.083,45.441 ccw(c26.194,45.377) v1@26.126,45.267 ; v1(29.362,26.721) 29.992,26.092 v1(29.992,18.37) ; v1(30.455,28.296) 32.08,29.921 32.08,31.013 33.071,32.004 v1(33.401,32.004) ; 32.624,31.557 cw(c33.401,30.78) v1@33.401,31.879 ; 33.051,31.984 cw(c33.401,31.634) v1@33.401,32.129 ; v1@33.313,31.916 ccw(c33.099,31.702) 33.099,32.004 ccw(c33.099,32.306) v1@33.313,32.092 ; 25.942,46.025 cw(c25.942,46.643) 25.505,46.206 ccw(c25.942,46.643) 25.942,46.025 ; 25.942,46.025 ccw(c25.942,45.407) 25.505,45.844 cw(c25.942,45.407) 25.942,46.025 ; 29.576,26.507 cw(c29.789,26.721) 29.487,26.721 ccw(c29.789,26.721) 29.576,26.507 ; 29.576,26.507 ccw(c29.362,26.294) 29.362,26.596 cw(c29.362,26.294) 29.576,26.507 ; 29.992,18.672 cw(c29.69,18.672) 29.903,18.458 ccw(c29.69,18.672) 29.992,18.672 ; 29.992,18.672 ccw(c30.293,18.672) 30.08,18.458 cw(c30.293,18.672) 29.992,18.672 ; 30.668,28.509 cw(c30.455,28.722) 30.455,28.421 ccw(c30.455,28.722) 30.668,28.509 ; 30.668,28.509 ccw(c30.881,28.296) 30.58,28.296 cw(c30.881,28.296) 30.668,28.509 ; v1@25.972,45.25 ccw(c25.575,45.647) 26.137,45.647 cw(c25.575,45.647) v1@25.972,45.25
K5: K5.1 K5.2 R24.2 U4.48 | length 110.6
  Top Layer w0.25: v1(-7.112,50.622) -6.02,50.622 ; v1(-5.74,28.702) v1(-5.74,33.426) ; v1(-5.588,44.704) -4.75,45.542 -4.75,48.946 -5.918,50.114 -5.918,50.724 -5.512,51.13 6.279,51.13 11.862,56.713 v1(11.862,56.769) ; -6.81,50.622 cw(c-6.81,50.924) -7.024,50.711 ccw(c-6.81,50.924) -6.81,50.622 ; -6.81,50.622 ccw(c-6.81,50.32) -7.024,50.534 cw(c-6.81,50.32) -6.81,50.622 ; -5.74,29.004 cw(c-6.042,29.004) -5.829,28.79 ccw(c-6.042,29.004) -5.74,29.004 ; -5.74,29.004 ccw(c-5.439,29.004) -5.652,28.79 cw(c-5.439,29.004) -5.74,29.004 ; -5.74,33.125 cw(c-5.439,33.125) -5.652,33.338 ccw(c-5.439,33.125) -5.74,33.125 ; -5.74,33.125 ccw(c-6.042,33.125) -5.829,33.338 cw(c-6.042,33.125) -5.74,33.125 ; -5.375,44.917 cw(c-5.588,45.131) -5.588,44.829 ccw(c-5.588,45.131) -5.375,44.917 ; -5.375,44.917 ccw(c-5.161,44.704) -5.463,44.704 cw(c-5.161,44.704) -5.375,44.917 ; 11.609,56.461 ccw(c11.301,56.769) 11.737,56.769 cw(c11.301,56.769) 11.609,56.461
  Top Layer w0.3: v1@3.15,19.507 3.15,13.97 4.369,12.75 K5.1@4.369,10.143 K5.2@13.019,10.143 ; 4.369,11.109 cw(c3.404,11.109) 4.087,10.426 ccw(c3.404,11.109) 4.369,11.109 ; 4.369,11.109 ccw(c5.335,11.109) 4.652,10.426 cw(c5.335,11.109) 4.369,11.109 ; 5.61,10.143 cw(c5.61,11.109) 4.927,10.426 ccw(c5.61,11.109) 5.61,10.143 ; 5.61,10.143 ccw(c5.61,9.177) 4.927,9.86 cw(c5.61,9.177) 5.61,10.143 ; 11.779,10.143 cw(c11.779,9.177) 12.462,9.86 ccw(c11.779,9.177) 11.779,10.143 ; 11.779,10.143 ccw(c11.779,11.109) 12.462,10.426 cw(c11.779,11.109) 11.779,10.143 ; 3.15,19.169 cw(c3.564,19.169) 3.271,19.462 ccw(c3.564,19.169) 3.15,19.169
  Bottom Layer w0.25: R24.2@-7.312,51.16 cw(c-7.48,50.857) -7.145,50.947 cw(c-6.956,50.997) R24.2@-7.057,51.165 ; -7.205,50.886 cw(c-7.296,50.796) v1@-7.203,50.708 ; v1@-7.188,50.698 R24.2@-7.188,51.384 ; v1@-7.178,50.728 ccw(c-7.246,50.838) -7.134,50.902 ; v1(-5.74,33.426) -5.74,34.468 -7.95,36.678 -7.95,42.342 v1(-5.588,44.704) ; v1(11.862,56.769) 13.705,58.613 13.767,58.613 14.566,59.412 U4.48@14.566,64.112 ; -7.248,50.989 ccw(c-6.837,51.099) v1@-7.05,50.73 ; -7.248,50.989 ccw(c-6.837,51.099) v1@-7.05,50.73 ; -7.248,50.989 ccw(c-6.837,51.099) v1@-7.05,50.73 ; v1@-7.188,50.766 cw(c-6.57,50.766) -7.007,51.203 ccw(c-6.57,50.766) v1@-7.188,50.766 ; v1@-7.188,50.766 ccw(c-7.806,50.766) -7.369,51.203 cw(c-7.806,50.766) v1@-7.188,50.766 ; -5.801,44.491 cw(c-5.588,44.277) -5.588,44.579 ccw(c-5.588,44.277) -5.801,44.491 ; -5.801,44.491 ccw(c-6.015,44.704) -5.713,44.704 cw(c-6.015,44.704) -5.801,44.491 ; -5.74,33.728 cw(c-6.042,33.728) -5.829,33.515 ccw(c-6.042,33.728) -5.74,33.728 ; -5.74,33.728 ccw(c-5.439,33.728) -5.652,33.515 cw(c-5.439,33.728) -5.74,33.728 ; 12.075,56.982 cw(c11.862,57.196) 11.862,56.894 ccw(c11.862,57.196) 12.075,56.982 ; 12.075,56.982 ccw(c12.289,56.769) 11.987,56.769 cw(c12.289,56.769) 12.075,56.982 ; R24.2@-7.188,51.108 ccw(c-6.626,51.108) -7.024,50.711 cw(c-6.626,51.108) R24.2@-7.188,51.108
  Bottom Layer w0.35: v1@-5.893,28.778 -5.893,27.737 2.311,19.533 v1(3.2,19.533) ; -5.848,28.371 ccw(c-6.188,28.567) v1@-5.812,28.68 ; -5.893,28.153 cw(c-5.191,28.153) -5.687,28.649 ccw(c-5.191,28.153) -5.893,28.153
K6: K6.1 K6.2 R25.2 U4.35 | length 85.4
  Top Layer w0.3: K6.1@20.092,10.143 K6.2@28.742,10.143 v1(30.632,12.033) ; v1(26.619,40.792) 27.559,39.853 29.185,39.853 32.69,36.348 32.69,31.039 v1(32.893,30.836) ; v1(30.124,26.899) v1(31.039,27.813) ; 32.69,31.568 ccw(c33.625,31.568) v1@32.964,30.906 ; 21.333,10.143 cw(c21.333,11.109) 20.65,10.426 ccw(c21.333,11.109) 21.333,10.143 ; 21.333,10.143 ccw(c21.333,9.177) 20.65,9.86 cw(c21.333,9.177) 21.333,10.143 ; 27.501,10.143 cw(c27.501,9.177) 28.184,9.86 ccw(c27.501,9.177) 27.501,10.143 ; 27.501,10.143 ccw(c27.501,11.109) 28.184,10.426 cw(c27.501,11.109) 27.501,10.143 ; K6.2@29.117,10.143 cw(c30.022,10.143) 29.382,10.783 ccw(c30.022,10.143) K6.2@29.117,10.143 ; K6.2@29.417,10.143 cw(c31.047,10.143) 29.894,11.295 ccw(c31.047,10.143) K6.2@29.417,10.143
  Bottom Layer w0.25: U4.35@21.066,64.112 21.066,60.495 22.391,59.17 22.391,56.093 26.695,51.789 26.695,44.044 26.67,44.018 ; R25.2@25.324,44.018 26.67,44.018 ; v1@26.67,40.843 26.67,44.018 ; 25.942,44.018 cw(c25.942,44.636) 25.505,44.199 ccw(c25.942,44.636) 25.942,44.018 ; 25.942,44.018 ccw(c25.942,43.4) 25.505,43.837 cw(c25.942,43.4) 25.942,44.018 ; v1@26.531,40.881 ccw(c26.195,41.217) 26.67,41.217 cw(c26.195,41.217) v1@26.531,40.881
  Bottom Layer w0.3: v1(30.124,26.899) 30.632,26.391 v1(30.632,12.033) ; v1(31.039,27.813) 32.893,29.667 v1(32.893,30.836)
K7: K7.1 K7.2 R26.2 U4.33 | length 86.3
  Top Layer w0.3: v1(25.298,39.065) 25.984,38.379 v1(26.746,38.379) 29.235,38.379 31.521,36.093 31.521,29.642 33.426,27.737 36.068,27.737 37.592,26.213 37.592,10.143 ; K7.1@36.17,10.143 37.592,10.143 ; K7.2@44.82,10.143 37.592,10.143 ; 37.411,10.143 cw(c37.411,11.109) 36.728,10.426 ccw(c37.411,11.109) 37.411,10.143 ; 37.411,10.143 ccw(c37.411,9.177) 36.728,9.86 cw(c37.411,9.177) 37.411,10.143 ; 43.58,10.143 cw(c43.58,9.177) 44.262,9.86 ccw(c43.58,9.177) 43.58,10.143 ; 43.58,10.143 ccw(c43.58,11.109) 44.262,10.426 cw(c43.58,11.109) 43.58,10.143
  Bottom Layer w0.25: U4.33@22.066,64.112 22.066,60.777 23.3,59.543 23.3,57.223 23.298,57.221 23.298,56.469 27.667,52.1 27.667,40.005 26.746,39.085 v1(26.746,38.379) ; 26.746,38.681 cw(c26.444,38.681) 26.658,38.468 ccw(c26.444,38.681) 26.746,38.681 ; 26.746,38.681 ccw(c27.048,38.681) 26.835,38.468 cw(c27.048,38.681) 26.746,38.681
  Bottom Layer w0.3: v1@25.273,39.091 R26.2@25.273,39.827 ; v1@25.212,39.115 ccw(c24.919,39.284) 25.246,39.372 ; v1@25.212,39.115 ccw(c24.919,39.284) 25.246,39.372 ; v1@25.212,39.115 ccw(c24.919,39.284) 25.246,39.372 ; v1@25.273,39.27 cw(c25.831,39.27) 25.436,39.664 ccw(c25.831,39.27) v1@25.273,39.27 ; v1@25.273,39.27 ccw(c24.715,39.27) 25.11,39.664 cw(c24.715,39.27) v1@25.273,39.27 ; 25.313,39.419 ccw(c25.627,39.335) v1@25.376,39.129 ; 25.313,39.419 ccw(c25.627,39.335) v1@25.376,39.129 ; 25.313,39.419 ccw(c25.627,39.335) v1@25.376,39.129 ; 25.273,39.368 ccw(c25.601,39.368) 25.369,39.136 cw(c25.601,39.368) 25.273,39.368
K8: K8.1 K8.2 R27.2 U4.34 | length 101.3
  Top Layer w0.3: K8.1@20.237,1.916 K8.2@28.887,1.916 29.525,1.916 32.766,5.156 32.766,17.678 30.979,19.466 27.5,19.466 26.568,20.398 v1(26.568,21.59) ; v1(25.959,37.567) 28.854,37.567 30.963,35.458 30.963,29.743 v1(27.432,26.213) ; 21.477,1.916 cw(c21.477,2.881) 20.795,2.198 ccw(c21.477,2.881) 21.477,1.916 ; 21.477,1.916 ccw(c21.477,0.95) 20.795,1.633 cw(c21.477,0.95) 21.477,1.916 ; 27.646,1.916 cw(c27.646,0.95) 28.329,1.633 ccw(c27.646,0.95) 27.646,1.916 ; 27.646,1.916 ccw(c27.646,2.881) 28.329,2.198 cw(c27.646,2.881) 27.646,1.916 ; K8.2@29.162,2.016 ccw(c29.162,3.135) 29.953,2.343 cw(c29.162,3.135) K8.2@29.162,2.016 ; K8.2@29.162,2.316 ccw(c29.162,4.159) 30.465,2.856 cw(c29.162,4.159) K8.2@29.162,2.316
  Bottom Layer w0.25: U4.34@21.566,64.112 21.566,60.636 22.845,59.357 22.845,56.281 27.213,51.912 27.213,40.193 25.959,38.938 v1(25.959,37.567) ; R27.2@25.273,37.795 25.502,37.567 v1(25.959,37.567) ; 25.657,37.567 cw(c25.657,37.265) 25.87,37.478 ccw(c25.657,37.265) 25.657,37.567 ; 25.657,37.567 ccw(c25.657,37.868) v1@25.87,37.655 ; 25.657,37.567 ccw(c25.657,37.868) v1@25.87,37.655 ; v1@25.87,37.655 ccw(c25.657,37.868) 25.959,37.868 ; v1@25.87,37.655 ccw(c25.657,37.868) 25.959,37.868 ; v1(25.959,37.567) cw(c25.959,38.038) 25.514,37.881 ccw(c25.959,38.038) v1(25.959,37.567) ; 25.959,37.868 ccw(c26.261,37.868) 26.047,37.655 cw(c26.261,37.868) 25.959,37.868 ; R27.2@25.279,37.797 ccw(c25.605,37.913) 25.605,37.567 cw(c25.605,37.913) R27.2@25.279,37.797
  Bottom Layer w0.3: v1(26.568,21.59) 27.432,22.454 v1(27.432,26.213)
LCD_BL: R12.1 U4.78 | length 22.4
  Bottom Layer w0.25: R12.1@-0.756,84.018 -0.756,85.122 0.279,86.157 6.604,86.157 10.262,82.499 12.649,82.499 14.566,80.582 U4.78@14.566,79.312 ; -0.756,84.636 cw(c-1.374,84.636) -0.937,84.199 ccw(c-1.374,84.636) -0.756,84.636 ; -0.756,84.636 ccw(c-0.138,84.636) -0.575,84.199 cw(c-0.138,84.636) -0.756,84.636
LCD_CS: J1.7 U4.88 | length 17.4
  Top Layer w0.25: J1.7@6.807,80.625 10.611,80.625 12.047,82.061 18.599,82.061 v1(18.974,81.686) ; 18.76,81.9 cw(c18.547,81.686) 18.849,81.686 ccw(c18.547,81.686) 18.76,81.9 ; 18.76,81.9 ccw(c18.974,82.113) 18.974,81.811 cw(c18.974,82.113) 18.76,81.9
  Bottom Layer w0.25: v1(18.974,81.686) 19.566,81.094 U4.88@19.566,79.312 ; 19.187,81.473 cw(c19.401,81.686) 19.099,81.686 ccw(c19.401,81.686) 19.187,81.473 ; 19.187,81.473 ccw(c18.974,81.26) 18.974,81.561 cw(c18.974,81.26) 19.187,81.473